# Altium PCB Main_PCB.PcbDoc (part 1 of 2)
Units mil, origin at the board's own origin, x right, y up, seen from the top; angles counter-clockwise.
Board outline 5905.51 x 3937.01 mil, 2 copper layers (Top Layer, Bottom Layer); 255 components, 189 nets, 763 pads, 261 vias.
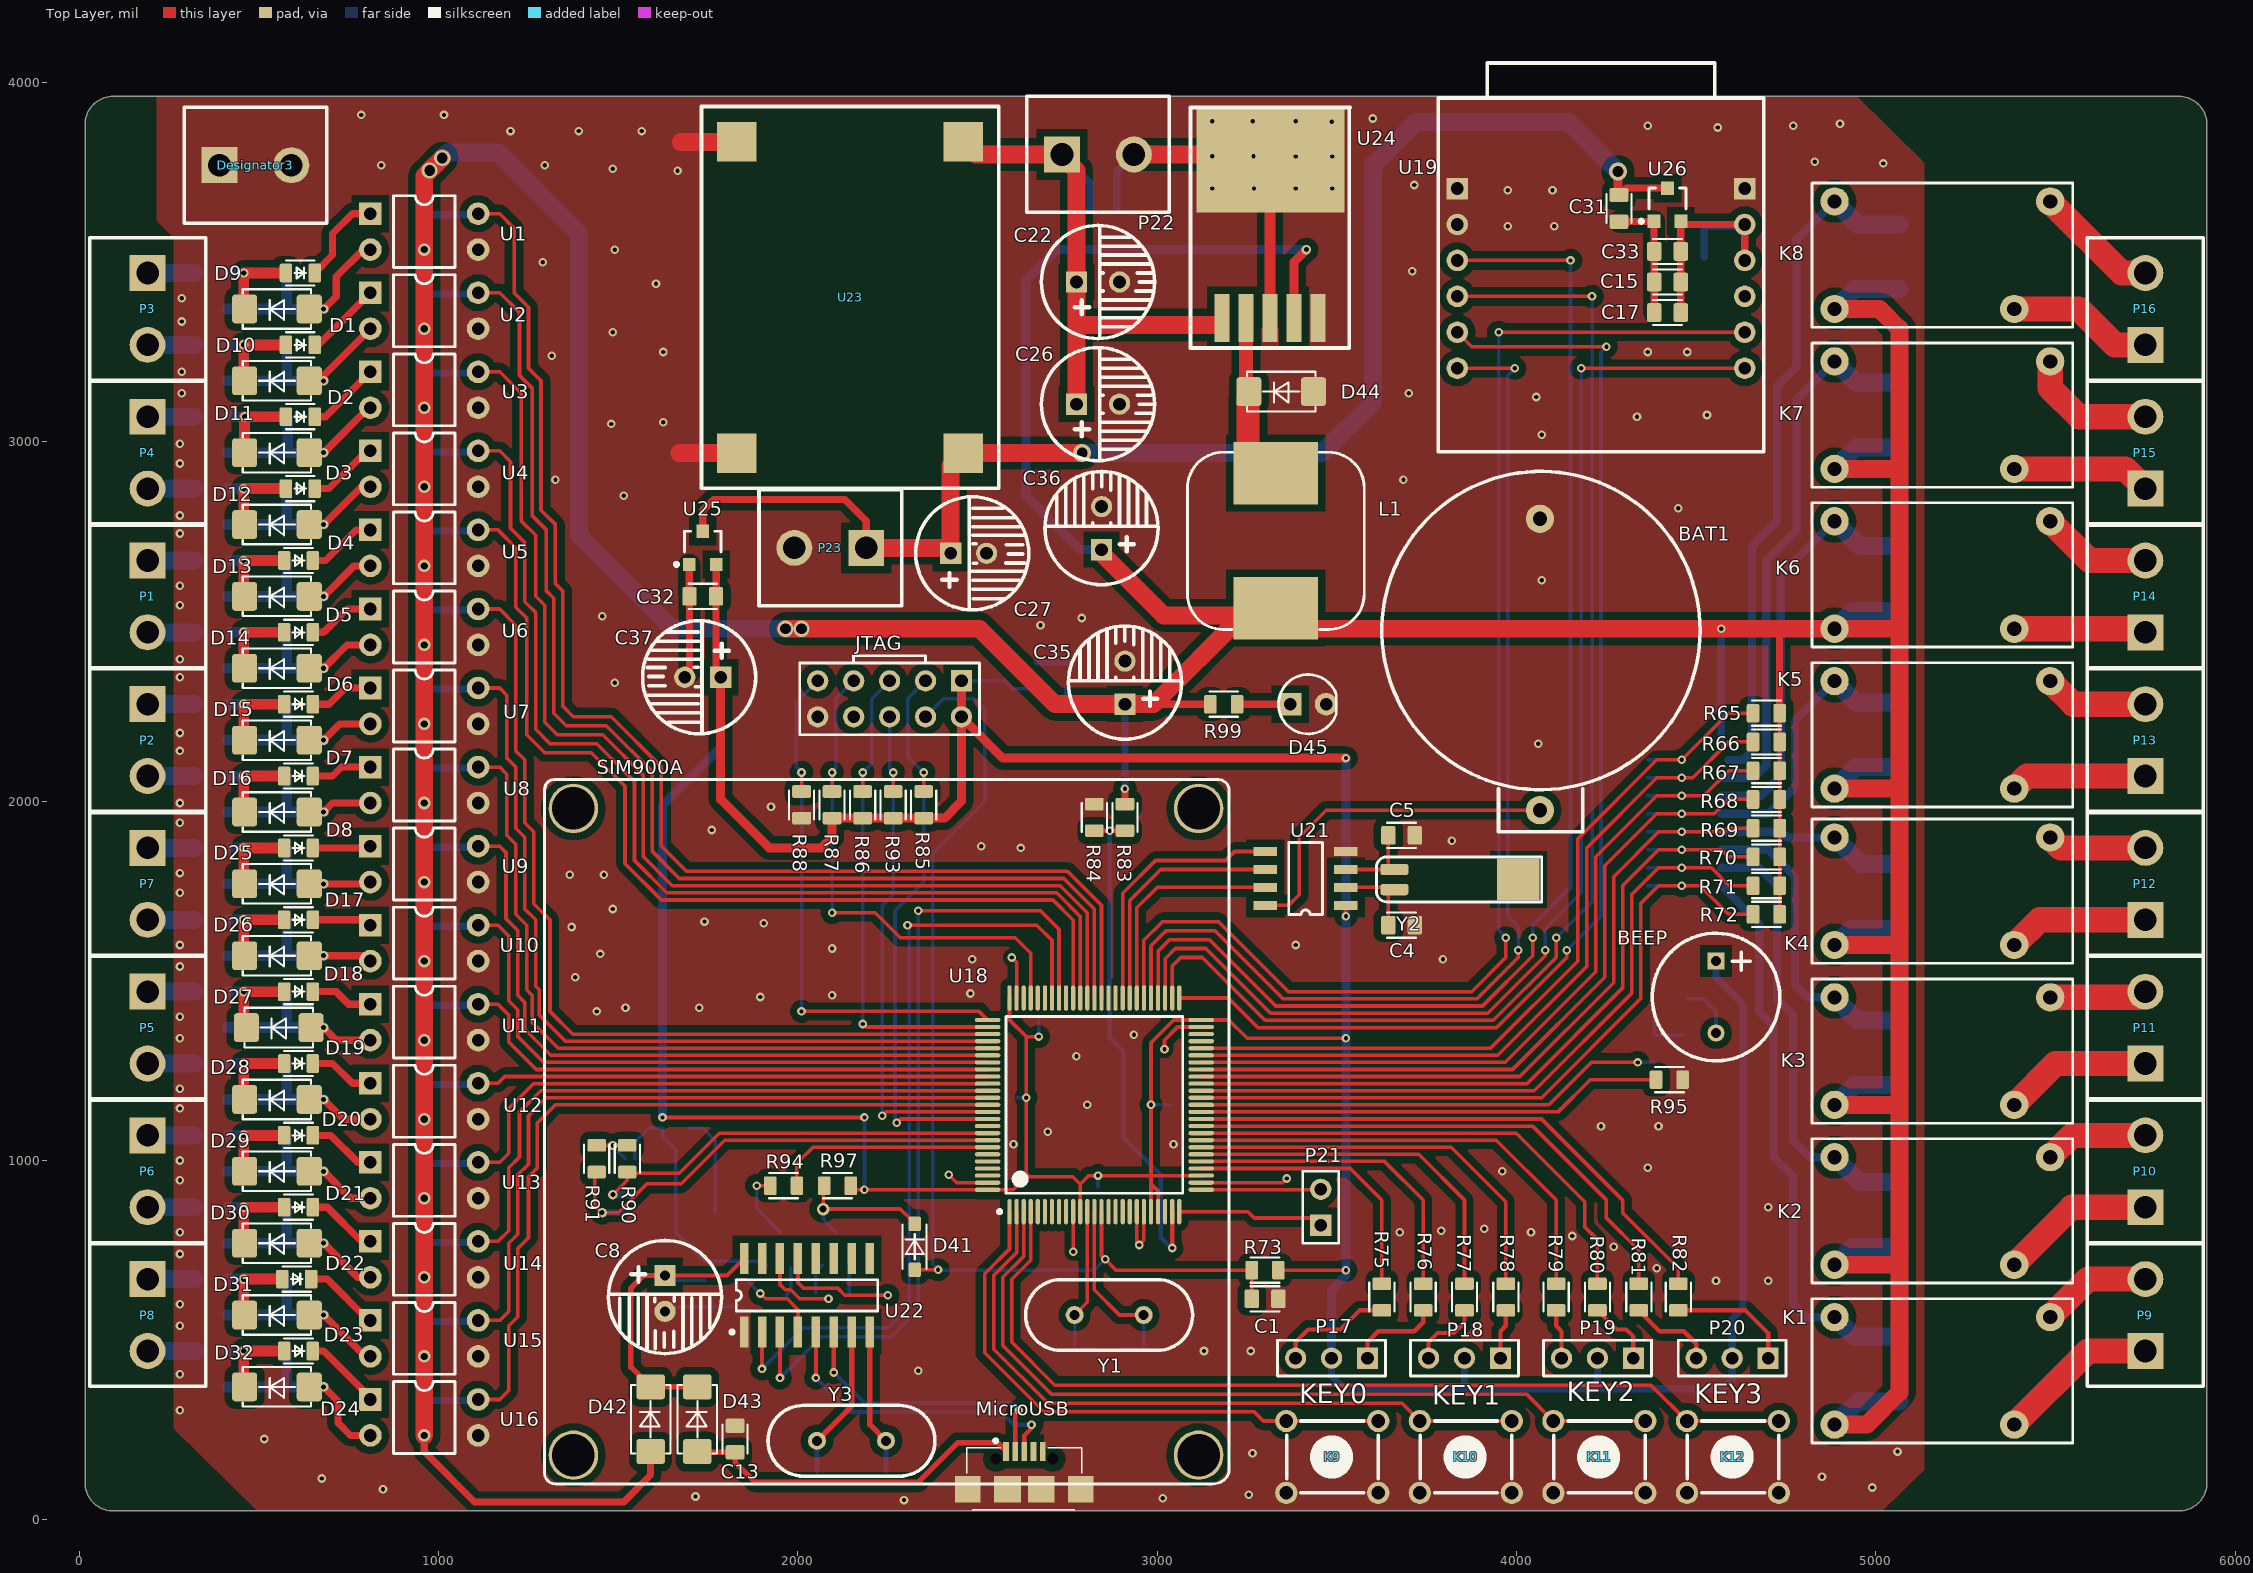
[diagram p0: Top Layer view]
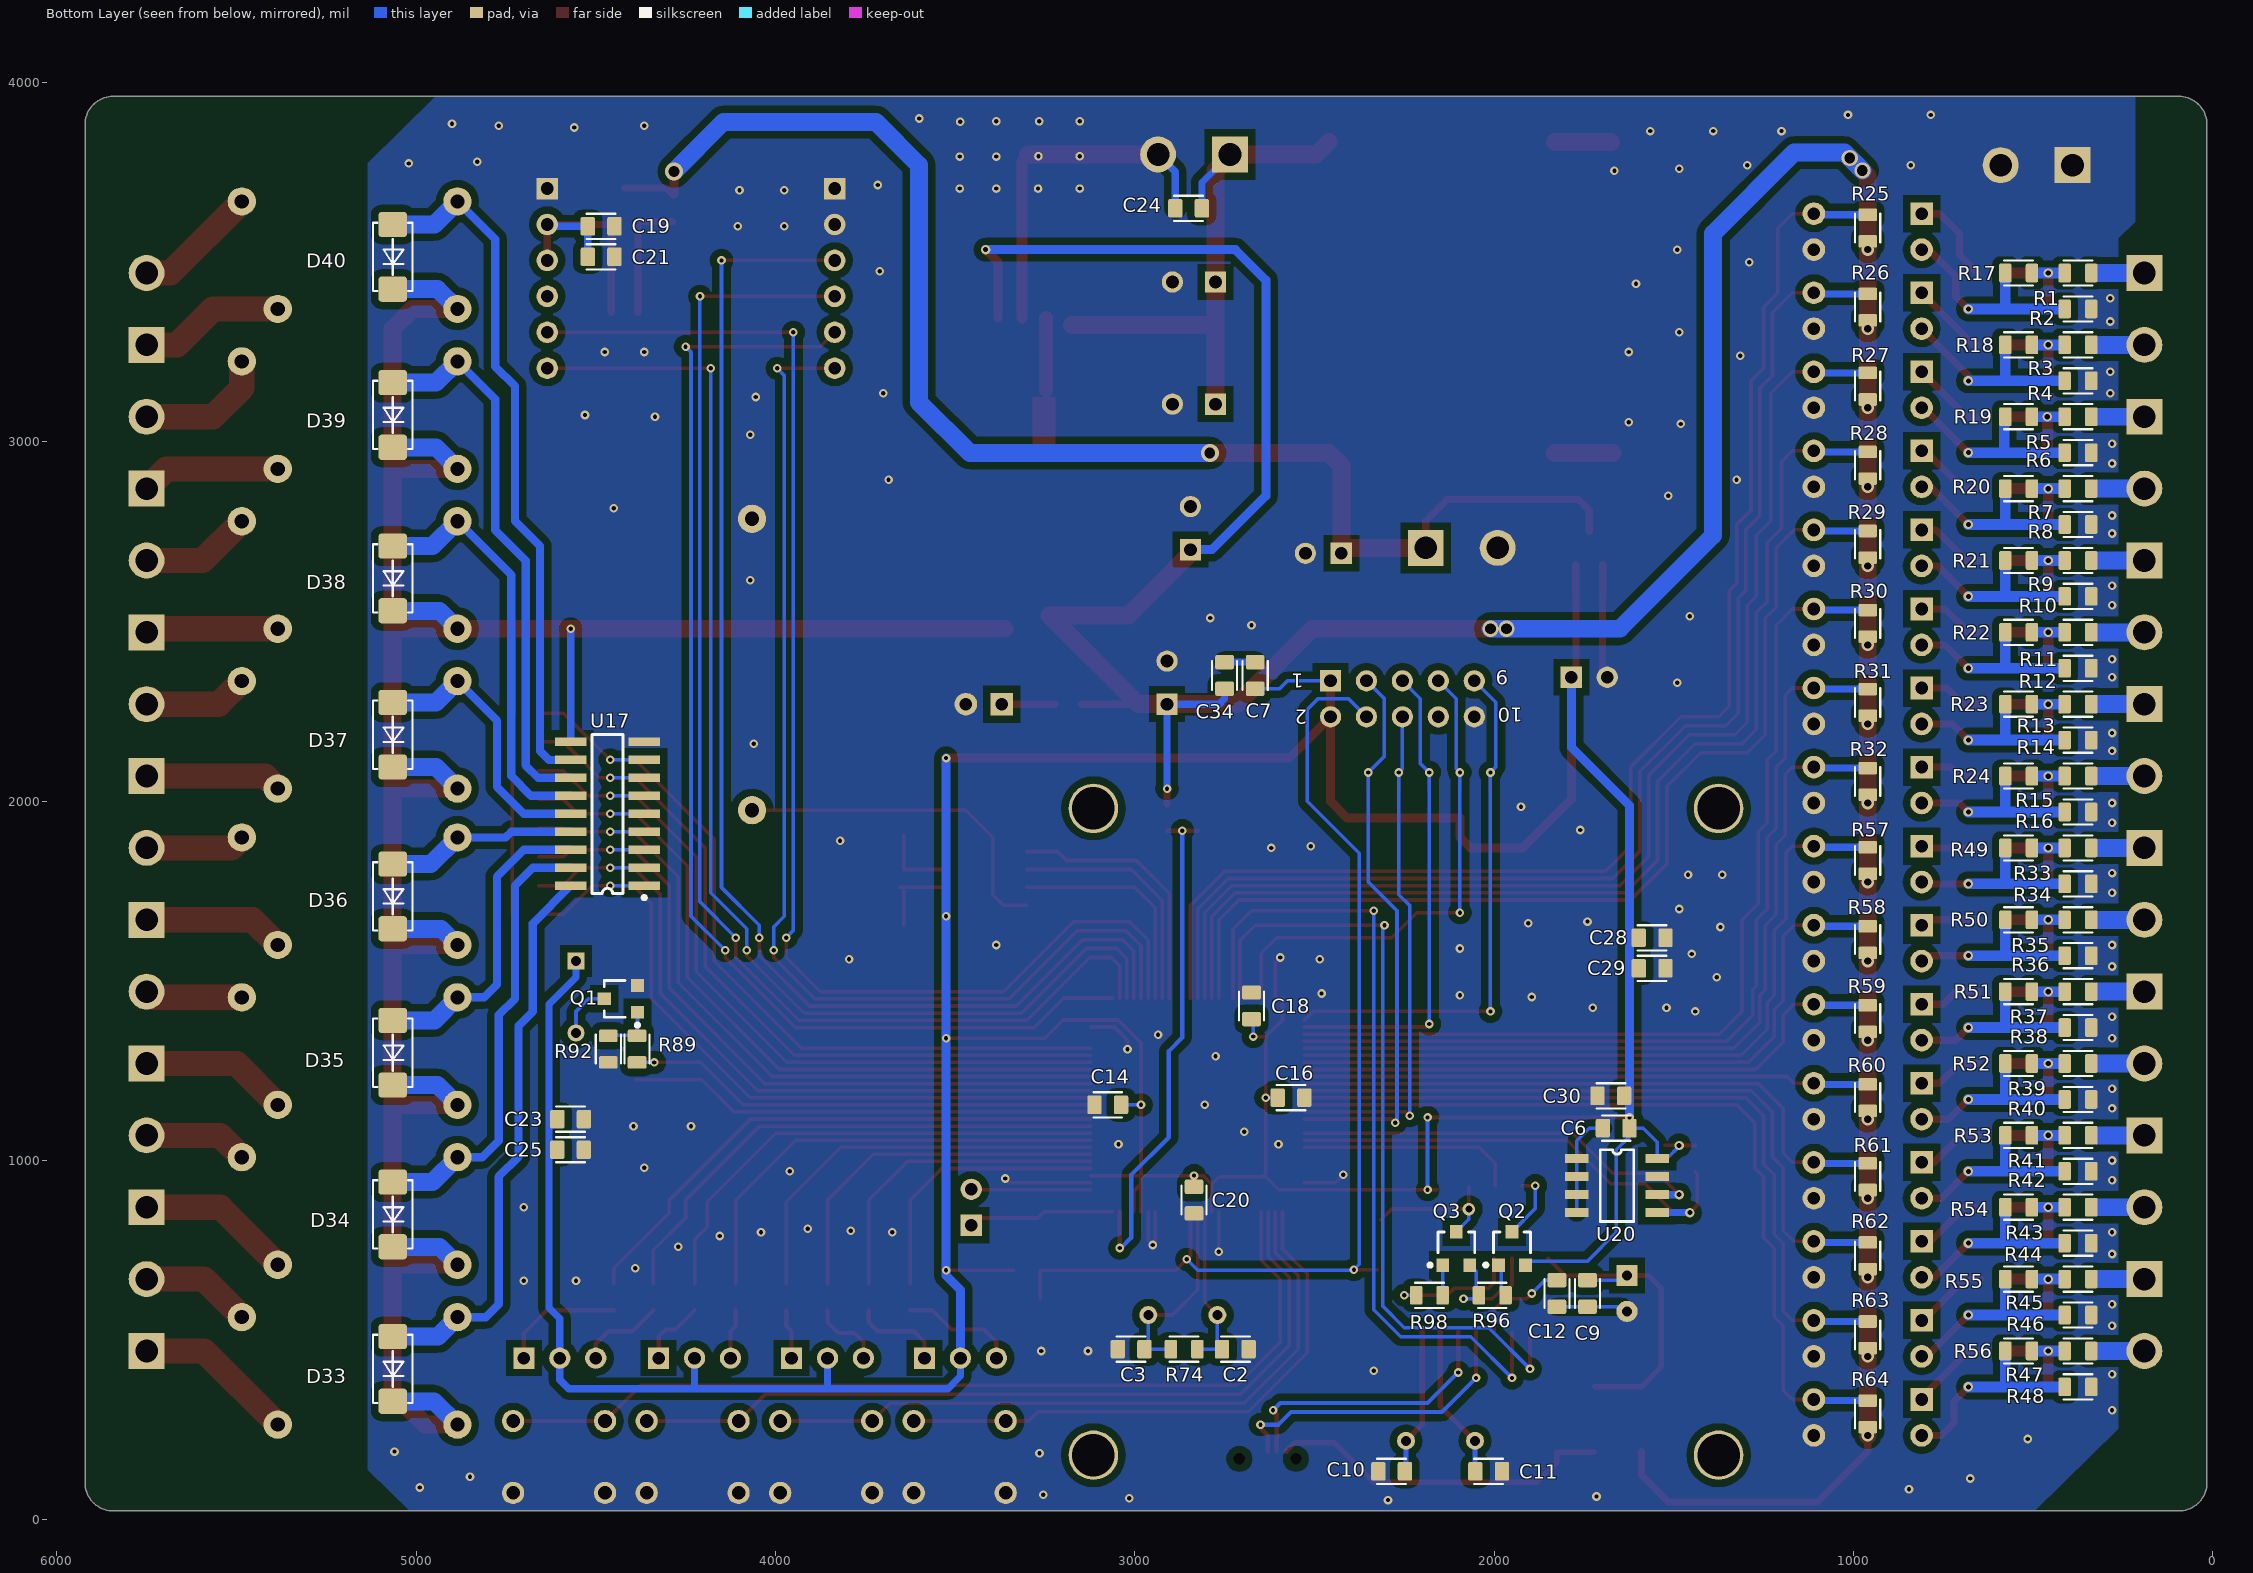
[diagram p1: Bottom Layer view, seen from below]
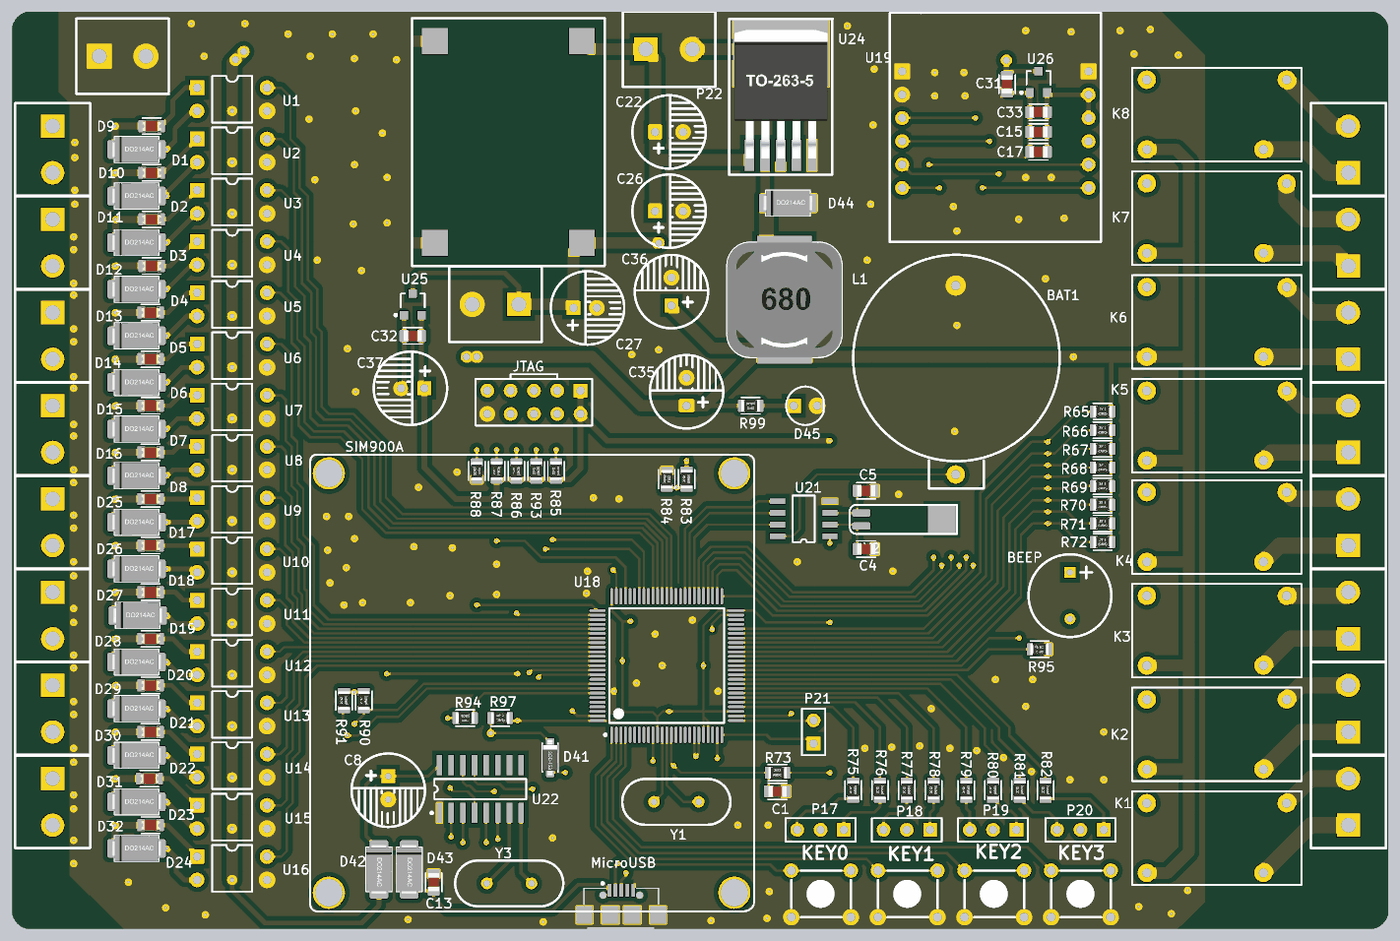
[diagram p3: 3D render of the assembled board from above, using the file's embedded part models]
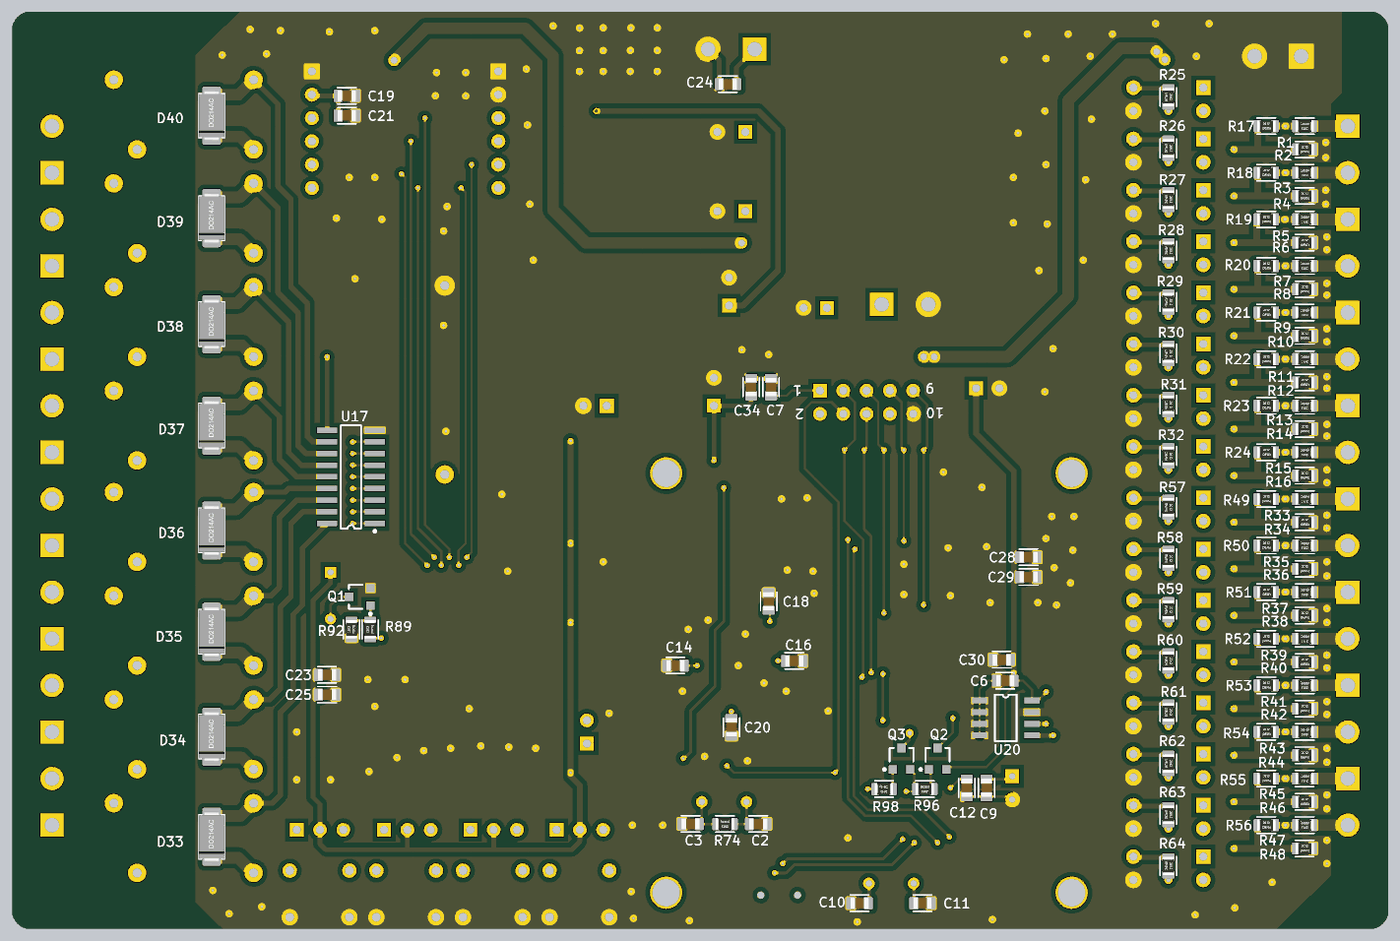
[diagram p4: 3D render of the assembled board from below, using the file's embedded part models]

## Layer stack, top to bottom
Top Layer: signal copper 1.4
Dielectric: dielectric 12.6, FR-4, Dk 4.8
Bottom Layer: signal copper 1.4

## Board outline
15.87,103.41 ccw(c94.61,103.41) 94.61,24.67 5842.64,24.67 ccw(c5842.64,103.41) 5921.38,103.41 5921.38,3882.94 ccw(c5842.64,3882.94) 5842.64,3961.68 94.61,3961.68 ccw(c94.61,3882.94) 15.87,3882.94

## Design rules (kind name [scope] priority, off if disabled: settings)
Clearance [All] p1: gap=10
PolygonConnect [All] p1: connectstyle=Direct reliefconductorwidth=10 reliefentries=4 polygonreliefangle="90 Angle" airgapwidth=10
RoutingVias [All] p1: holewidth=14 width=26 viastyle="Through Hole" minholewidth=12 minwidth=24 maxholewidth=28 maxwidth=50
SolderMaskExpansion [All] p1: expansion=4
Width [All] p1: maxlimit=80 minlimit=10 preferedwidth=20
28 further rules are at their usual default settings.

## Classes and differential pairs
component class InputOutput: D1 D2 D3 D4 D5 D6 D7 D8 D9 D10 D11 D12 D13 D14 D15 D16 D17 D18 D19 D20 D21 D22 D23 D24 D25 D26 D27 D28 D29 D30 D31 D32 D33 D34 D35 D36 D37 D38 D39 D40 K1 K2 K3 K4 K5 K6 K7 K8 P1 P2 P3 P4 P5 P6 P7 P8 P9 P10 P11 P12 P13 P14 P15 P16 R1 R2 R3 R4 R5 R6 R7 R8 R9 R10 R11 R12 R13 R14 R15 R16 R17 R18 R19 R20 R21 R22 R23 R24 R25 R26 R27 R28 R29 R30 R31 R32 R33 R34 R35 R36 R37 R38 R39 R40 R41 R42 R43 R44 R45 R46 R47 R48 R49 R50 R51 R52 R53 R54 R55 R56 R57 R58 R59 R60 R61 R62 R63 R64 R65 R66 R67 R68 R69 R70 R71 R72 U1 U2 U3 U4 U5 U6 U7 U8 U9 U10 U11 U12 U13 U14 U15 U16 U17
component class Main_Sch: BAT1 BEEP C1 C2 C3 C4 C5 C6 C7 JTAG K9 K10 K11 K12 P17 P18 P19 P20 P21 Q1 R73 R74 R75 R76 R77 R78 R79 R80 R81 R82 R83 R84 R85 R86 R87 R88 R89 R90 R91 R92 R93 U18 U19 U20 U21 Y1 Y2
component class OneKey_Download: C8 C9 C10 C11 C12 C13 D41 D42 D43 MicroUSB Q2 Q3 R94 R95 R96 R97 R98 U22 Y3
component class Power: C14 C15 C16 C17 C18 C19 C20 C21 C22 C23 C24 C25 C26 C27 C28 C29 C30 C31 C32 C33 C34 C35 C36 D45 L1 P22 P23 R99 U23 U24 U25 U26

## Components (designator, comment, footprint, x,y, rotation, side; value= is the part's Value field where it differs from the comment)
BAT1 "BATT" CR2032 4065,1975 r180 top
BEEP "BEEP" BELL-5 4555,1555 r270 top (schematic designator BEEP1)
C1 "104" 0805-CAP 3300,615 r0 top
C2 "22p" 0805-CAP 2720,475 r180 bottom
C3 "22p" 0805-CAP 3010,475 r0 bottom
C4 "104" 0805-CAP 3680,1655 r180 top
C5 "104" 0805-CAP 3680,1905 r180 top
C6 "104" 0805-CAP 1660,1090 r0 bottom
C7 "104" 0805-CAP 2665,2350 r90 bottom
C8 "10uF" CAP2.54#1 1630,680 r270 top
C9 "104" 0805-CAP 1740,630 r90 bottom
C10 "22P" 0805-CAP 2285,135 r180 bottom
C11 "22P" 0805-CAP 2015,135 r0 bottom
C12 "104" 0805-CAP 1825,630 r270 bottom
C13 "104" 0805-CAP 1825,225 r270 top
C14 "104" 0805-CAP 3075,1155 r180 bottom
C15 "104" 0805-CAP 4420,3445 r0 top
C16 "104" 0805-CAP 2565,1175 r0 bottom
C17 "104" 0805-CAP 4420,3360 r0 top
C18 "104" 0805-CAP 2675,1430.59 r270 bottom
C19 "104" 0805-CAP 4485,3600 r0 bottom
C20 "104" 0805-CAP 2835,890 r90 bottom
C21 "104" 0805-CAP 4485,3515 r0 bottom
C22 "220uF" CAP3.0 2775,3445 r180 top
C23 "104" 0805-CAP 4570,1115 r0 bottom
C24 "104" 0805-CAP 2850,3650 r180 bottom
C25 "104" 0805-CAP 4570,1030 r0 bottom
C26 "10uF" CAP3.0 2775,3105 r180 top
C27 "100uF" CAP2.54#2 2425,2690 r0 top
C28 "104" 0805-CAP 1560,1620 r0 bottom
C29 "104" 0805-CAP 1560,1535 r0 bottom
C30 "104" 0805-CAP 1675,1180 r180 bottom
C31 "1uF" 0805-CAP 4285,3650 r270 top
C32 "1uF" 0805-CAP 1735,2570 r180 top
C33 "1uF" 0805-CAP 4420,3530 r180 top
C34 "104" 0805-CAP 2750,2350 r270 bottom
C35 "10uF" CAP3.0 2910,2270 r270 top
C36 "220uF" CAP3.0 2845,2700 r270 top
C37 "100uF" CAP2.54#2 1785,2345 r180 top
D1 "1N5819(SS14)" DO-214AC(SMA) 550,3370 r180 top
D2 "1N5819(SS14)" DO-214AC(SMA) 550,3170 r180 top
D3 "1N5819(SS14)" DO-214AC(SMA) 550,2970 r180 top
D4 "1N5819(SS14)" DO-214AC(SMA) 550,2770 r180 top
D5 "1N5819(SS14)" DO-214AC(SMA) 550,2570 r180 top
D6 "1N5819(SS14)" DO-214AC(SMA) 550,2370 r180 top
D7 "1N5819(SS14)" DO-214AC(SMA) 550,2170 r180 top
D8 "1N5819(SS14)" DO-214AC(SMA) 550,1970 r180 top
D9 "LED-R" 0805-LED 615,3470 r0 top
D10 "LED-R" 0805-LED 615,3270 r0 top
D11 "LED-R" 0805-LED 615,3070 r0 top
D12 "LED-R" 0805-LED 615,2870 r0 top
D13 "LED-R" 0805-LED 610,2670 r0 top
D14 "LED-R" 0805-LED 610,2470 r0 top
D15 "LED-R" 0805-LED 610,2270 r0 top
D16 "LED-R" 0805-LED 610,2070 r0 top
D17 "1N5819(SS14)" DO-214AC(SMA) 550,1770 r180 top
D18 "1N5819(SS14)" DO-214AC(SMA) 550,1570 r180 top
D19 "1N5819(SS14)" DO-214AC(SMA) 555,1370 r180 top
D20 "1N5819(SS14)" DO-214AC(SMA) 550,1170 r180 top
D21 "1N5819(SS14)" DO-214AC(SMA) 550,970 r180 top
D22 "1N5819(SS14)" DO-214AC(SMA) 550,770 r180 top
D23 "1N5819(SS14)" DO-214AC(SMA) 550,570 r180 top
D24 "1N5819(SS14)" DO-214AC(SMA) 550,370 r180 top
D25 "LED-R" 0805-LED 610,1870 r0 top
D26 "LED-R" 0805-LED 610,1670 r0 top
D27 "LED-R" 0805-LED 610,1470 r0 top
D28 "LED-R" 0805-LED 610,1270 r0 top
D29 "LED-R" 0805-LED 610,1070 r0 top
D30 "LED-R" 0805-LED 610,870 r0 top
D31 "LED-R" 0805-LED 605,670 r0 top
D32 "LED-R" 0805-LED 610,470 r0 top
D33 "1N4007" DO-214AC(SMA) 5065,420 r270 bottom
D34 "1N4007" DO-214AC(SMA) 5065,850 r270 bottom
D35 "1N4007" DO-214AC(SMA) 5065,1300 r270 bottom
D36 "1N4007" DO-214AC(SMA) 5065,1735 r270 bottom
D37 "1N4007" DO-214AC(SMA) 5065,2185 r270 bottom
D38 "1N4007" DO-214AC(SMA) 5065,2620 r270 bottom
D39 "1N4007" DO-214AC(SMA) 5065,3075 r270 bottom
D40 "1N4007" DO-214AC(SMA) 5065,3515 r270 bottom
D41 "1N4148(T4)" SOD-123 2325,760 r90 top
D42 "1N5819(SS14)" DO-214AC(SMA) 1590,280 r90 top
D43 "1N5819(SS14)" DO-214AC(SMA) 1720,280 r90 top
D44 "SS54" DO-214AC(SMA) 3345,3140 r180 top
D45 "LED-R" DIO-LIG 3370,2270 r0 top
Designator3 "Comment" 2edg5.08_2 390,3770 r0 top
JTAG "JTAG_10" JTAG_10 2455,2335 r180 top (schematic designator JTAG_1)
K1 "307" RELAY-SONGCHUAN 4885,265 r0 top
K2 "307" RELAY-SONGCHUAN 4885,710 r0 top
K3 "307" RELAY-SONGCHUAN 4885,1155 r0 top
K4 "307" RELAY-SONGCHUAN 4885,1600 r0 top
K5 "307" RELAY-SONGCHUAN 4885,2035 r0 top
K6 "307" RELAY-SONGCHUAN 4885,2480 r0 top
K7 "307" RELAY-SONGCHUAN 4885,2925 r0 top
K8 "307" RELAY-SONGCHUAN 4885,3370 r0 top
K9 "KEY_M" KEY_M 3615,75 r180 top
K10 "KEY_M" KEY_M 3986.67,75 r180 top
K11 "KEY_M" KEY_M 4358.33,75 r180 top
K12 "KEY_M" KEY_M 4730,75 r180 top
L1 "470uH" MSS1278CUST 3330,2725 r270 top
MicroUSB "MicroUSB" USB_micro 2630,85 r0 top (schematic designator USB_1)
P1 "2edg5.08" 2edg5.08_2 190,2670 r270 top
P2 "2edg5.08" 2edg5.08_2 190,2270 r270 top
P3 "2edg5.08" 2edg5.08_2 190,3470 r270 top
P4 "2edg5.08" 2edg5.08_2 190,3070 r270 top
P5 "2edg5.08" 2edg5.08_2 190,1470 r270 top
P6 "2edg5.08" 2edg5.08_2 190,1070 r270 top
P7 "2edg5.08" 2edg5.08_2 190,1870 r270 top
P8 "2edg5.08" 2edg5.08_2 190,670 r270 top
P9 "2edg5.08" 2edg5.08_2 5750,470 r90 top
P10 "2edg5.08" 2edg5.08_2 5750,870 r90 top
P11 "2edg5.08" 2edg5.08_2 5750,1270 r90 top
P12 "2edg5.08" 2edg5.08_2 5750,1670 r90 top
P13 "2edg5.08" 2edg5.08_2 5750,2070 r90 top
P14 "2edg5.08" 2edg5.08_2 5750,2470 r90 top
P15 "2edg5.08" 2edg5.08_2 5750,2870 r90 top
P16 "2edg5.08" 2edg5.08_2 5750,3270 r90 top
P17 "Header 3" HDR1X3 3585,450 r180 top
P18 "Header 3" HDR1X3 3955,450 r180 top
P19 "Header 3" HDR1X3 4325,450 r180 top
P20 "Header 3" HDR1X3 4700,450 r180 top
P21 "Header 2" HDR1X2 3455,820 r90 top
P22 "2edg5.08" 2edg5.08_2 2735,3800 r0 top
P23 "Li" 2edg5.08_2 2190,2705 r180 top
Q1 "S8050" SOT-23R 4425,1450 r90 bottom
Q2 "S8550" SOT-23R 1950,750 r180 bottom
Q3 "S8050" SOT-23R 2105,750 r180 bottom
R1 "2K" 0805-RES 375,3470 r0 bottom
R2 "2K" 0805-RES 375,3370 r180 bottom
R3 "2K" 0805-RES 375,3270 r0 bottom
R4 "2K" 0805-RES 375,3170 r180 bottom
R5 "2K" 0805-RES 375,3070 r0 bottom
R6 "2K" 0805-RES 375,2970 r180 bottom
R7 "2K" 0805-RES 375,2870 r0 bottom
R8 "2K" 0805-RES 375,2770 r180 bottom
R9 "2K" 0805-RES 375,2670 r0 bottom
R10 "2K" 0805-RES 375,2570 r180 bottom
R11 "2K" 0805-RES 375,2470 r0 bottom
R12 "2K" 0805-RES 375,2370 r180 bottom
R13 "2K" 0805-RES 375,2270 r0 bottom
R14 "2K" 0805-RES 375,2170 r180 bottom
R15 "2K" 0805-RES 375,2070 r0 bottom
R16 "2K" 0805-RES 375,1970 r180 bottom
R17 "1K" 0805-RES 540,3470 r180 bottom
R18 "1K" 0805-RES 540,3270 r180 bottom
R19 "1K" 0805-RES 540,3070 r180 bottom
R20 "1K" 0805-RES 540,2870 r180 bottom
R21 "1K" 0805-RES 540,2670 r180 bottom
R22 "1K" 0805-RES 540,2470 r180 bottom
R23 "1K" 0805-RES 540,2270 r180 bottom
R24 "1K" 0805-RES 540,2070 r180 bottom
R25 "4.7K" 0805-RES 960,3595 r270 bottom
R26 "4.7K" 0805-RES 960,3375 r270 bottom
R27 "4.7K" 0805-RES 960,3155 r270 bottom
R28 "4.7K" 0805-RES 960,2935 r270 bottom
R29 "4.7K" 0805-RES 960,2715 r270 bottom
R30 "4.7K" 0805-RES 960,2495 r270 bottom
R31 "4.7K" 0805-RES 960,2275 r270 bottom
R32 "4.7K" 0805-RES 960,2055 r270 bottom
R33 "2K" 0805-RES 375,1870 r0 bottom
R34 "2K" 0805-RES 375,1770 r180 bottom
R35 "2K" 0805-RES 375,1670 r0 bottom
R36 "2K" 0805-RES 375,1570 r180 bottom
R37 "2K" 0805-RES 375,1470 r0 bottom
R38 "2K" 0805-RES 375,1370 r180 bottom
R39 "2K" 0805-RES 375,1270 r0 bottom
R40 "2K" 0805-RES 375,1170 r180 bottom
R41 "2K" 0805-RES 375,1070 r0 bottom
R42 "2K" 0805-RES 375,970 r180 bottom
R43 "2K" 0805-RES 375,870 r0 bottom
R44 "2K" 0805-RES 375,770 r180 bottom
R45 "2K" 0805-RES 375,670 r0 bottom
R46 "2K" 0805-RES 375,570 r180 bottom
R47 "2K" 0805-RES 375,470 r0 bottom
R48 "2K" 0805-RES 375,370 r180 bottom
R49 "1K" 0805-RES 540,1870 r180 bottom
R50 "1K" 0805-RES 540,1670 r180 bottom
R51 "1K" 0805-RES 540,1470 r180 bottom
R52 "1K" 0805-RES 540,1270 r180 bottom
R53 "1K" 0805-RES 540,1070 r180 bottom
R54 "1K" 0805-RES 540,870 r180 bottom
R55 "1K" 0805-RES 540,670 r180 bottom
R56 "1K" 0805-RES 540,470 r180 bottom
R57 "4.7K" 0805-RES 960,1835 r270 bottom
R58 "4.7K" 0805-RES 960,1615 r270 bottom
R59 "4.7K" 0805-RES 960,1395 r270 bottom
R60 "4.7K" 0805-RES 960,1175 r270 bottom
R61 "4.7K" 0805-RES 960,955 r270 bottom
R62 "4.7K" 0805-RES 960,735 r270 bottom
R63 "4.7K" 0805-RES 960,515 r270 bottom
R64 "4.7K" 0805-RES 960,295 r270 bottom
R65 "10K" 0805-RES 4695,2245 r0 top
R66 "10K" 0805-RES 4695,2165 r0 top
R67 "10K" 0805-RES 4695,2085 r0 top
R68 "10K" 0805-RES 4695,2005 r0 top
R69 "10K" 0805-RES 4695,1925 r0 top
R70 "10K" 0805-RES 4695,1845 r0 top
R71 "10K" 0805-RES 4695,1765 r0 top
R72 "10K" 0805-RES 4695,1685 r0 top
R73 "10K-5% 0805" 0805-RES 3300,695 r0 top
R74 "1M" 0805-RES 2862.5,475 r0 bottom
R75 "510R" 0805-RES 3625,620 r90 top
R76 "510R" 0805-RES 3740,620 r90 top
R77 "10K" 0805-RES 3855,620 r90 top
R78 "10K" 0805-RES 3970,620 r90 top
R79 "10K" 0805-RES 4110,620 r90 top
R80 "10K" 0805-RES 4225,620 r90 top
R81 "10K" 0805-RES 4340,620 r90 top
R82 "10K" 0805-RES 4450,620 r90 top
R83 "10K" 0805-RES 2910,1955 r90 top
R84 "10K" 0805-RES 2825,1955 r270 top
R85 "10K" 0805-RES 2350,1990 r90 top
R86 "10K" 0805-RES 2180,1990 r90 top
R87 "10K" 0805-RES 2095,1990 r90 top
R88 "10K" 0805-RES 2010,1990 r270 top
R89 "1K" 0805-RES 4385,1310 r90 bottom
R90 "4.7K" 0805-RES 1525,1005 r90 top
R91 "4.7K" 0805-RES 1440,1005 r90 top
R92 "10K" 0805-RES 4465,1310 r90 bottom
R93 "10K" 0805-RES 2265,1990 r90 top
R94 "1K" 0805-RES 1960,930 r180 top
R95 "10K" 0805-RES 4425,1225 r180 top
R96 "1K" 0805-RES 2005,625 r0 bottom
R97 "10K" 0805-RES 2110,930 r0 top
R98 "1K" 0805-RES 2180,625 r0 bottom
R99 "510R" 0805-RES 3185,2270 r180 top
SIM900A "Comment" SIM900A-Model 1375,1980 r0 top locked
U1 "TLP521-1" DIP4 810,3635 r0 top
U2 "TLP521-1" DIP4 810,3415 r0 top
U3 "TLP521-1" DIP4 810,3195 r0 top
U4 "TLP521-1" DIP4 810,2975 r0 top
U5 "TLP521-1" DIP4 810,2755 r0 top
U6 "TLP521-1" DIP4 810,2535 r0 top
U7 "TLP521-1" DIP4 810,2315 r0 top
U8 "TLP521-1" DIP4 810,2095 r0 top
U9 "TLP521-1" DIP4 810,1875 r0 top
U10 "TLP521-1" DIP4 810,1655 r0 top
U11 "TLP521-1" DIP4 810,1435 r0 top
U12 "TLP521-1" DIP4 810,1215 r0 top
U13 "TLP521-1" DIP4 810,995 r0 top
U14 "TLP521-1" DIP4 810,775 r0 top
U15 "TLP521-1" DIP4 810,555 r0 top
U16 "TLP521-1" DIP4 810,335 r0 top
U17 "uln2803" SOP18 4365,1765 r90 bottom
U18 "STM32F103VET6" LQFP100_N 2825,1155 r90 top
U19 "W5500" W5500-Model 3835,3705 r0 top locked
U20 "24C02" SOP-8 1770,1005 r180 bottom
U21 "DS1302" SOP-8 3525,1710 r180 top
U22 "CH340G" SOP16M 2025,625 r0 top
U23 "Li-Charg" Li-Charg 2460,3835 r270 top
U24 "LM2596S_5.0" TO-263-5-2 3180,3345 r0 top
U25 "XC6206" SOT-23R 1735,2700 r0 top
U26 "XC6206" SOT-23R 4420,3655 r0 top
Y1 "8MHz" XTAL_US 2770,570 r0 top
Y2 "32.768KHz" XTAL32_1 3660,1810 r0 top
Y3 "12MHz" XTAL_US 2245,220 r180 top

## Footprints (in the part's own frame and the unit in brackets; to place one, negate y for a bottom-side part, rotate by r counter-clockwise, add the part's x,y. Pads: shape width x height; smd on the part's side, far side on the other; paste and mask are expansions set on the pad)
2edg5.08_2 [mm]
  rect 2.54x2.54 hole 1.6: 1(0,0)
  round 2.54 hole 1.6: 2(5.08,0)
  silkscreen extent -2.5,-4.1 7.58,4.1
0805-CAP [mil]
  rrect25% 40x52 smd: 1(-37,0) 2(37,0)
  silkscreen extent -40,-35 40,35, body extent -39,-24 39,23, height 47
0805-LED [mil]
  rrect25% 35x52 smd: 1(-40,0) 2(40,0)
  silkscreen extent -40,-35 40,35, body extent -40,-25 40,24, height 43
0805-RES [mil]
  rrect25% 35x52 smd: 1(-37,0) 2(37,0)
  silkscreen extent -40,-35 40,35, body extent -39,-25 40,24, height 18
BELL-5 [mm]
  rect 1.2x1.2 hole 0.7: 1(0,0)
  round 1.2 hole 0.7: 2(5.08,0)
  silkscreen extent -1.97,-4.51 7.05,4.51
CAP2.54#1 [mm]
  rect 1.5x1.5 hole 0.7: 1(0,0)
  round 1.5 hole 0.7: 2(2.54,0)
  silkscreen extent -2.48,-4 5.52,4
CAP2.54#2 [mm]
  rect 1.5x1.5 hole 0.9: 1(0,0)
  round 1.5 hole 0.9: 2(2.54,0)
  silkscreen extent -2.48,-4 5.52,4
CAP3.0 [mm]
  rect 1.5x1.5 hole 0.9: 1(0,0)
  round 1.5 hole 0.9: 2(-3.048,0)
  silkscreen extent -5.52,-4 2.48,4
CR2032 [mm]
  round 2 hole 1: 1(0,0) 2(0,-20.6)
  silkscreen extent -11.32,-23.95 11.17,1.52
DIO-LIG [mm]
  rect 1.6x1.6 hole 0.9: 1(0,0)
  round 1.6 hole 0.9: 2(2.54,0)
  silkscreen extent -0.83,-2.1 3.26,2.1
DIP4 [mm]
  rect 1.6x1.6 hole 0.9: 1(0,0)
  round 1.6 hole 0.9: 2(0,-2.54) 3(7.62,-2.54) 4(7.62,0)
  silkscreen extent 1.63,-3.81 5.99,1.27
DO-214AC(SMA) [mil]
  rrect25% 70x80 smd: 1(-90,0) 2(90,0)
  silkscreen extent -95,-55 95,55, body extent -108,-55 108,55, height 91
HDR1X2 [mm] "Connector; Header; 2 Position"
  rect 1.5x1.5 hole 0.9: 1(0,0)
  round 1.5 hole 0.9: 2(2.54,0)
  silkscreen extent -1.27,-1.27 3.81,1.27
HDR1X3 [mm] "Connector; Header; 3 Position"
  rect 1.5x1.5 hole 0.9: 1(0,0)
  round 1.5 hole 0.9: 2(2.54,0) 3(5.08,0)
  silkscreen extent -1.27,-1.27 6.35,1.27
JTAG_10 [mm]
  rect 1.5x1.5 hole 0.9: 1(0,0)
  round 1.5 hole 0.9: 2(0,2.54) 3(2.54,0) 4(2.54,2.54) 5(5.08,0) 6(5.08,2.54) 7(7.62,0) 8(7.62,2.54) 9(10.16,0) 10(10.16,2.54)
  silkscreen extent -1.27,-1.78 11.43,3.81
KEY_M [mil]
  round 62 hole 38: 1(0,0) 1(255.91,0) 2(0,-200) 2(255.91,-200)
  silkscreen extent 0,-200 255,0
Li-Charg [mm]
  rect 2.8x2.8 smd: 1(0,0) 2(0,-16) 3(22,-16) 4(22,0)
  Top Layer pour cut-out: -2.5,2.5 24.5,2.5 24.5,-18.5 -2.5,-18.5
  silkscreen extent -2.5,-18.5 24.5,2.5
LQFP100_N [mm] "Thin QFP, 100-Leads, Body 14x14mm, Pitch 0.5mm, IPC Medium Density"
  oval 1.8x0.3 smd: 1(-7.55,6) 2(-7.55,5.5) 3(-7.55,5) 4(-7.55,4.5) 5(-7.55,4) 6(-7.55,3.5) 7(-7.55,3) 8(-7.55,2.5) 9(-7.55,2) 10(-7.55,1.5) 11(-7.55,1) 12(-7.55,0.5) 13(-7.55,0) 14(-7.55,-0.5) 15(-7.55,-1) 16(-7.55,-1.5) 17(-7.55,-2) 18(-7.55,-2.5) 19(-7.55,-3) 20(-7.55,-3.5) 21(-7.55,-4) 22(-7.55,-4.5) 23(-7.55,-5) 24(-7.55,-5.5) 25(-7.55,-6) 51(7.55,-6) 52(7.55,-5.5) 53(7.55,-5) 54(7.55,-4.5) 55(7.55,-4) 56(7.55,-3.5) 57(7.55,-3) 58(7.55,-2.5) 59(7.55,-2) 60(7.55,-1.5) 61(7.55,-1) 62(7.55,-0.5) 63(7.55,0) 64(7.55,0.5) 65(7.55,1) 66(7.55,1.5) 67(7.55,2) 68(7.55,2.5) 69(7.55,3) 70(7.55,3.5) 71(7.55,4) 72(7.55,4.5) 73(7.55,5) 74(7.55,5.5) 75(7.55,6)
  oval 0.3x1.8 smd: 26(-6,-7.55) 27(-5.5,-7.55) 28(-5,-7.55) 29(-4.5,-7.55) 30(-4,-7.55) 31(-3.5,-7.55) 32(-3,-7.55) 33(-2.5,-7.55) 34(-2,-7.55) 35(-1.5,-7.55) 36(-1,-7.55) 37(-0.5,-7.55) 38(0,-7.55) 39(0.5,-7.55) 40(1,-7.55) 41(1.5,-7.55) 42(2,-7.55) 43(2.5,-7.55) 44(3,-7.55) 45(3.5,-7.55) 46(4,-7.55) 47(4.5,-7.55) 48(5,-7.55) 49(5.5,-7.55) 50(6,-7.55) 76(6,7.55) 77(5.5,7.55) 78(5,7.55) 79(4.5,7.55) 80(4,7.55) 81(3.5,7.55) 82(3,7.55) 83(2.5,7.55) 84(2,7.55) 85(1.5,7.55) 86(1,7.55) 87(0.5,7.55) 88(0,7.55) 89(-0.5,7.55) 90(-1,7.55) 91(-1.5,7.55) 92(-2,7.55) 93(-2.5,7.55) 94(-3,7.55) 95(-3.5,7.55) 96(-4,7.55) 97(-4.5,7.55) 98(-5,7.55) 99(-5.5,7.55) 100(-6,7.55)
  silkscreen extent -7.67,-6.25 6.25,6.82, body extent -7,-7 7,7, height 1.6
MSS1278CUST [mil]
  rect 172.87x236 smd: 1(-187.87,0) 2(187.87,0)
  silkscreen extent -246,-246 247,246, body extent -246,-246 246,246, height 248
RELAY-SONGCHUAN [mm]
  round 2 hole 1: 1(12.7,0) 2(15.24,7.6) 3(0,7.6) 4(0,0)
  silkscreen extent -1.6,-1.3 16.84,8.9
SIM900A-Model [mm]
  round 3.5 hole 3: ""(0,-45.72) ""(0,0) ""(44.196,-45.72) ""(44.196,0)
  silkscreen extent -2.03,-47.75 46.35,2.03
SOD-123 [mil]
  rrect25% 40x35 smd: 1(-64,0) 2(64,0)
  silkscreen extent -62,-33 62,34, body extent -76,-33 76,34, height 56
SOP16M [mm]
  rect 0.6x2.2 smd: 1(-4.445,-2.6) 2(-3.175,-2.6) 3(-1.905,-2.6) 4(-0.635,-2.6) 5(0.635,-2.6) 6(1.905,-2.6) 7(3.175,-2.6) 8(4.445,-2.6) 9(4.445,2.6) 10(3.175,2.6) 11(1.905,2.6) 12(0.635,2.6) 13(-0.635,2.6) 14(-1.905,2.6) 15(-3.175,2.6) 16(-4.445,2.6)
  silkscreen extent -5.42,-2.72 5,1.1
SOP18 [mm]
  rect 0.6x2.2 smd: 1(0,0) 2(1.27,0) 3(2.54,0) 4(3.81,0) 5(5.08,0) 6(6.35,0) 7(7.62,0) 8(8.89,0) 9(10.16,0) 10(10.16,5.2) 11(8.89,5.2) 12(7.62,5.2) 13(6.35,5.2) 14(5.08,5.2) 15(3.81,5.2) 16(2.54,5.2) 17(1.27,5.2) 18(0,5.2)
  silkscreen extent -0.97,-0.12 10.69,3.7
SOP-8 [mil]
  rect 65x25 smd: 1(0,0) 2(0,-50) 3(0,-100) 4(0,-150) 5(224.41,-150) 6(224.41,-100) 7(224.41,-50) 8(224.41,0)
  silkscreen extent 65,-175 159,25
SOT-23R [mm]
  rect 0.9x0.95 smd: 1(0.95,-1.048) 2(-0.95,-1.048) 3(0,1.302)
  silkscreen extent -1.98,-1.17 1.3,1.3
TO-263-5-2 [mil]
  rect 41.34x133.86 smd: 1(0,0) 2(66.93,0) 3(133.86,0) 4(200.79,0) 5(267.72,0)
  round 24 hole 12: 6(-27,360) 6(-27,450) 6(-27,547) 6(86,547) 6(88,450) 6(89,360) 6(205,360) 6(205,449) 6(205,547) 6(306,546) 6(307,360) 6(307,449)
  rect 411.42x287.4 smd: 6(135.17,437.37)
  silkscreen extent -87,-84 356,586, body extent -65,-14 335,538, height 180
USB_micro [mm]
  rect 1.8x1.9 smd: 0(-4,0) 0(4,0)
  round 0 hole 0.8: 0(-2,2.15) 0(2,2.15)
  rect 1.9x1.9 smd: 0(-1.2,0) 0(1.2,0)
  rect 0.4x1.35 smd: 1(-1.3,2.675) 2(-0.65,2.675) 3(0,2.675) 4(0.65,2.675) 5(1.3,2.675)
  silkscreen extent -4.06,-1.45 4.06,3.55
W5500-Model [mil]
  rect 60x60 hole 35.43: 1(0,0) 12(800,0)
  round 60 hole 35.43: 2(0,-100) 3(0,-200) 4(0,-300) 5(0,-400) 6(0,-500) 7(800,-500) 8(800,-400) 9(800,-300) 10(800,-200) 11(800,-100)
  silkscreen extent -53,-732 853,349
XTAL32_1 [mil]
  rrect50% 78.74x31.5 smd: 1(0,0) 2(0,-56)
  rect 118x118 smd: ""(345,-28)
  Top Layer pour cut-out: 410,35 409.9,-90 44,-88 -1,-88 -21.01,-89.99 -45,-78 -50,-62 -50,6.01 -40,26 -22.01,35 3,32
  silkscreen extent -50,-90 410,35
XTAL_US [mil]
  round 50 hole 28: 1(0,0) 2(192.13,0)
  silkscreen extent -136,-98 328,98

## Part data
BAT1: library part BAT
C1 C2 C3 C6 C7: library part CAP, "陶瓷电容"
C4 C5 C9 C10 C11 C12 C13 C14 C15 C16 C17 C18 C19 C20 C21 C23 C24 C25 C28 C29 C30 C31 C32 C33 C34: library part C
C8 C22 C26 C27 C35 C36: library part CAP
D1 D2 D3 D4 D5 D6 D7 D8 D17 D18 D19 D20 D21 D22 D23 D24 D42 D43: "肖特基二极管"
D9 D10 D11 D12 D13 D14 D15 D16 D25 D26 D27 D28 D29 D30 D31 D32 D45: library part LED-RED, "红色LED"
D33 D34 D35 D36 D37 D38 D39 D40: "1A整流二极管"
D41: library part 1N4148, "高速开关二极管"
K1 K2 K3 K4 K5 K6 K7 K8: library part JDQ_307, "继电器"
L1: library part INDUCTOR
MicroUSB: library part USB5
P1 P2 P3 P4 P5 P6 P7 P8 P9 P10 P11 P12 P13 P14 P15 P16 P22 P23: library part 2EDG5.08_2, "端子"
P17 P18 P19 P20: "Header, 3-Pin"
P21: "Header, 2-Pin"
Q1 Q3: library part NPN, "8050/BCW846/BCW847"
Q2: library part PNP, "8550/BCW68"
R1 R2 R3 R4 R5 R6 R7 R8 R9 R10 R11 R12 R13 R14 R15 R16 R17 R18 R19 R20 R21 R22 R23 R24 R25 R26 R27 R28 R29 R30 R31 R32 R33 R34 R35 R36 R37 R38 R39 R40 R41 R42 R43 R44 R45 R46 R47 R48 R49 R50 R51 R52 R53 R54 R55 R56 R57 R58 R59 R60 R61 R62 R63 R64 R65 R66 R67 R68 R69 R70 R71 R72 R75 R76 R77 R78 R79 R80 R81 R82 R83 R84 R94 R95 R96 R97 R98 R99: library part Res
R73 R74 R85 R86 R87 R88 R90 R91 R93: library part RES-1%, "高精度电阻"
R89 R92: library part R
U1 U2 U3 U4 U5 U6 U7 U8 U9 U10 U11 U12 U13 U14 U15 U16: library part TLP521, "光耦"
U18: "STM32 ARM-based 32-bit MCU with 64 Kbytes Flash, 100-pin LQFP, Industrial Temperature"
U20: library part 24C256
U21: "实时时钟"
U22: "USB2UART"
U23: "锂电池充电模块"
U24: "3A开关电源芯片"
U25 U26: "LDO"
Y1 Y2 Y3: library part XTAL, "Crystal Oscillator"

## Via types
v1: diameter 24, hole 12, Top Layer to Bottom Layer, 202 vias
v2: diameter 26, hole 14, Top Layer to Bottom Layer, 20 vias
v3: diameter 35, hole 20, Top Layer to Bottom Layer, 17 vias
v4: diameter 26, hole 15, Top Layer to Bottom Layer, 16 vias
v5: diameter 45, hole 30, Top Layer to Bottom Layer, 4 vias
v6: diameter 50, hole 30, Top Layer to Bottom Layer, 2 vias

## Nets (pads, with @x,y where several pads share a name; then routed paths per layer and width w, separated by ;. In a path a pad name is that pad's centre, name@x,y a point inside that pad or via, vN(x,y) a via of type N, cw(c..) or ccw(c..) an arc to the next point about the centre after c; other vN are vias at no path point)
AD_IN1: R83.1 R84.2 U18.24 | length 1420.7
  Top Layer w12: R84.2@2825,1918 v1(2867.5,1918) R83.1@2910,1918 ; v1(3041.54,756.54) U18.24@3041.54,857.76
  Bottom Layer w12: v1(2867.5,1918) 2867.5,1342.5 2905,1305 2905,1065 3010,960 3010,785 v1@3040,755
BEEP: R89.1 U18.38 | length 1311.6
  Top Layer w10: U18.38@3122.24,1155 4090,1155 4208,1273 v1(4337,1273)
  Bottom Layer w10: v1(4337,1273) R89.1@4385,1273
BOOT0: R94.1 U18.94 | length 611.3
  Top Layer w10: R94.1@1997,930 1997,992 2041.89,1036.89 U18.94@2527.76,1036.89
BOOT1: R95.2 U18.37 | length 1302.9
  Top Layer w10: U18.37@3122.24,1135.31 4115.32,1135.31 4205,1225 R95.2@4388,1225
CH340_D+: MicroUSB.3 U22.5 | length 864.5
  Top Layer w12: v1(2050,395) U22.5@2050,522.64 ; MicroUSB.3@2630,190.31 2630,235 2650,255 v1(2650,265)
  Bottom Layer w12: v1(2050,395) 2145,300 2565,300 2600,265 v1(2650,265)
CH340_D-: MicroUSB.2 U22.6 | length 795.2
  Top Layer w12: v1(2100,410) U22.6@2100,522.64 ; MicroUSB.2@2604.41,190.31 2604.41,294.41 v1(2615,305)
  Bottom Layer w12: v1@2100,415 v1(2100,410) 2185,325 2595,325 v1(2615,305)
CPU_IN1: R25.1 U1.4 U18.62 | length 3765.9
  Top Layer w10: U1.4@1110,3635 1170,3635 1210,3595 1210,3415 1250,3375 1250,3205 1285,3170 1285,2810 1325,2770 1325,2605 1345,2585 1345,2265 1375,2235 1480,2235 1620,2095 1620,1875 1690,1805 2750,1805 2844.68,1710.31 U18.62@2844.68,1452.24
  Bottom Layer w20: R25.1@960,3632 U1.4@1107,3632
CPU_IN2: R26.1 U2.4 U18.63 | length 3547.5
  Top Layer w10: U2.4@1110,3415 1170,3415 1225,3360 1225,3185 1260,3150 1260,2795 1300,2755 1300,2585 1320,2565 1320,2245 1355,2210 1466.72,2210 1595,2081.72 1595,1860 1670,1785 2740,1785 2825,1700 U18.63@2825,1452.24
  Bottom Layer w20: R26.1@960,3412 U2.4@1107,3412
CPU_IN3: R27.1 U3.4 U18.64 | length 3333.8
  Top Layer w10: U3.4@1110,3195 1170,3195 1230,3135 1230,2780 1270,2740 1270,2570 1295,2545 1295,2220 1330,2185 1456.36,2185 1570,2071.36 1570,1845 1650,1765 2730,1765 2805.32,1689.69 U18.64@2805.32,1452.24
  Bottom Layer w20: R27.1@960,3192 U3.4@1107,3192
CPU_IN4: R28.1 U4.4 U18.65 | length 3110.7
  Top Layer w10: U4.4@1110,2975 1170,2975 1200,2945 1200,2760 1240,2720 1240,2555 1270,2525 1270,2200 1310,2160 1440,2160 1545,2055 1545,1835 1635,1745 2720,1745 2785.63,1679.37 U18.65@2785.63,1452.24
  Bottom Layer w20: R28.1@960,2972 U4.4@1107,2972
CPU_IN5: R29.1 U5.4 U18.66 | length 2882.5
  Top Layer w10: U5.4@1110,2755 1165,2755 1215,2705 1215,2540 1245,2510 1245,2185 1295,2135 1425,2135 1518.7,2041.3 1518.7,1826.3 1620,1725 2710,1725 2765.94,1669.06 U18.66@2765.94,1452.24
  Bottom Layer w20: R29.1@960,2752 U5.4@1107,2752
CPU_IN6: R30.1 U6.4 U18.78 | length 2628.9
  Top Layer w10: U6.4@1110,2535 1170,2535 1215,2490 1215,2140 1240,2115 1240,1940 1265,1915 1265,1715 1310,1670 1310,1415 1373.15,1351.85 U18.78@2527.76,1351.85
  Bottom Layer w20: R30.1@960,2532 U6.4@1107,2532
CPU_IN7: R31.1 U7.4 U18.79 | length 2440.5
  Top Layer w10: U7.4@1110,2315 1170,2315 1190,2295 1190,2120 1215,2095 1215,1925 1240,1900 1240,1700 1270,1670 1270,1485 1280,1475 1280,1405 1352.83,1332.17 U18.79@2527.76,1332.17
  Bottom Layer w20: R31.1@960,2312 U7.4@1107,2312
CPU_IN8: R32.1 U8.4 U18.80 | length 2252.1
  Top Layer w10: U8.4@1110,2095 1170,2095 1190,2075 1190,1905 1215,1880 1215,1685 1245,1655 1245,1475 1260,1460 1260,1385 1332.52,1312.48 U18.80@2527.76,1312.48
  Bottom Layer w20: R32.1@960,2092 U8.4@1107,2092
CPU_IN9: R57.1 U9.4 U18.81 | length 2063.7
  Top Layer w10: U9.4@1110,1875 1170,1875 1187.5,1857.5 1187.5,1672.5 1220,1640 1220,1460 1240,1440 1240,1365 1312.2,1292.8 U18.81@2527.76,1292.8
  Bottom Layer w20: R57.1@960,1872 U9.4@1107,1872
CPU_IN10: R58.1 U10.4 U18.82 | length 1872.3
  Top Layer w10: U10.4@1110,1655 1165,1655 1195,1625 1195,1445 1220,1420 1220,1345 1291.89,1273.11 U18.82@2527.76,1273.11
  Bottom Layer w20: R58.1@960,1652 U10.4@1107,1652
CPU_IN11: R59.1 U11.4 U18.83 | length 1683.9
  Top Layer w10: U11.4@1110,1435 1165,1435 1195,1405 1195,1330 1271.57,1253.43 U18.83@2527.76,1253.43
  Bottom Layer w20: R59.1@960,1432 U11.4@1107,1432
CPU_IN12: R60.1 U12.4 U18.84 | length 1572.5
  Top Layer w10: U12.4@1110,1215 1165,1215 1183.74,1233.74 U18.84@2527.76,1233.74
  Bottom Layer w20: R60.1@960,1212 U12.4@1107,1212
CPU_IN13: R61.1 U13.4 U18.85 | length 1728.7
  Top Layer w10: U13.4@1110,995 1170,995 1195,1020 1195,1145 1264.06,1214.06 U18.85@2527.76,1214.06
  Bottom Layer w20: R61.1@960,992 U13.4@1107,992
CPU_IN14: R62.1 U14.4 U18.86 | length 1914.2
  Top Layer w10: U14.4@1110,775 1165,775 1195,805 1195,980 1225,1010 1225,1135 1284.37,1194.37 U18.86@2527.76,1194.37
  Bottom Layer w20: R62.1@960,772 U14.4@1107,772
CPU_IN15: R63.1 U15.4 U18.87 | length 2108.5
  Top Layer w10: U15.4@1110,555 1170,555 1195,580 1195,770 1220,795 1220,960 1250,990 1250,1125 1299.69,1174.69 U18.87@2527.76,1174.69
  Bottom Layer w20: R63.1@960,552 U15.4@1107,552
CPU_IN16: R64.1 U16.4 U18.88 | length 2294
  Top Layer w10: U16.4@1110,335 1170,335 1195,360 1195,540 1220,565 1220,755 1250,785 1250,955 1275,980 1275,1105 1325,1155 U18.88@2527.76,1155
  Bottom Layer w20: R64.1@960,332 U16.4@1107,332
CPU_JDQ1: R72.1 U17.1 U18.39 | length 2063.6
  Top Layer w10: U18.39@3122.24,1174.69 4069.68,1174.69 4345,1450 4345,1715 4395,1765 v1(4460,1765) 4510,1765 4590,1685 R72.1@4658,1685
  Bottom Layer w10: U17.1@4365,1765 v1(4460,1765)
CPU_JDQ2: R71.1 U17.2 U18.40 | length 2069.6
  Top Layer w10: U18.40@3122.24,1194.37 4049.37,1194.37 4320,1465 4320,1740 4395,1815 v1(4460,1815) 4542.25,1815 4592.25,1765 R71.1@4658,1765
  Bottom Layer w10: U17.2@4365,1815 v1(4460,1815)
CPU_JDQ3: R70.1 U17.3 U18.41 | length 2075.6
  Top Layer w10: U18.41@3122.24,1214.06 4029.06,1214.06 4295,1480 4295,1765 4395,1865 v1(4460,1865) 4570,1865 4590,1845 R70.1@4658,1845
  Bottom Layer w10: U17.3@4365,1865 v1(4460,1865)
CPU_JDQ4: R69.1 U17.4 U18.42 | length 2089.9
  Top Layer w10: U18.42@3122.24,1233.74 4008.74,1233.74 4270,1495 4270,1790 4395,1915 v1(4460,1915) 4580,1915 4590,1925 R69.1@4658,1925
  Bottom Layer w10: U17.4@4365,1915 v1(4460,1915)
CPU_JDQ5: R68.1 U17.5 U18.43 | length 2123.7
  Top Layer w10: U18.43@3122.24,1253.43 3988.43,1253.43 4245,1510 4245,1820 4390,1965 v1(4460,1965) 4550,1965 4590,2005 R68.1@4658,2005
  Bottom Layer w10: U17.5@4365,1965 v1(4460,1965)
CPU_JDQ6: R67.1 U17.6 U18.44 | length 2154.5
  Top Layer w10: U18.44@3122.24,1273.11 3968.11,1273.11 4220,1525 4220,1845 4390,2015 v1(4460,2015) 4521,2015 4591,2085 R67.1@4658,2085
  Bottom Layer w10: U17.6@4365,2015 v1(4460,2015)
CPU_JDQ7: R66.1 U17.7 U18.45 | length 2185.3
  Top Layer w10: U18.45@3122.24,1292.8 3947.8,1292.8 4195,1540 4195,1870 4390,2065 v1(4460,2065) 4490,2065 4590,2165 R66.1@4658,2165
  Bottom Layer w10: U17.7@4365,2065 v1(4460,2065)
CPU_JDQ8: R65.1 U17.8 U18.46 | length 2216.2
  Top Layer w10: U18.46@3122.24,1312.48 3927.48,1312.48 4170,1555 4170,1895 4390,2115 v1(4460,2115) 4590,2245 R65.1@4658,2245
  Bottom Layer w10: U17.8@4365,2115 v1(4460,2115)
DS_IO: U18.58 U21.6 | length 684.2
  Top Layer w10: U18.58@2923.43,1452.24 2923.43,1723.43 3010,1810 U21.6@3300.59,1810
DS_RST: U18.59 U21.5 | length 736.5
  Top Layer w10: U18.59@2903.74,1452.24 2903.74,1743.74 2995,1835 3190,1835 3215,1860 U21.5@3300.59,1860
DS_SCLK: U18.57 U21.7 | length 631.9
  Top Layer w10: U18.57@2943.11,1452.24 2943.11,1703.11 3000,1760 U21.7@3300.59,1760
GND: BAT1.2 C1.2 C2.2 C3.2 C4.1 C5.1 C6.2 C7.2 C8.2 C9.1 C10.1 C11.1 C12.2 C13.1 C14.1 C15.1 C16.1 C17.1 C18.1 C19.1 C20.1 C21.1 C22.2 C23.1 C24.1 C25.1 C26.2 C27.2 C28.1 C29.1 C30.1 C31.2 C32.2 C33.2 C34.1 C35.2 C36.2 C37.2 D44.1 D45.2 Designator3.1 Designator3.2 JTAG.10 K9.1 K10.1 K11.1 K12.1 MicroUSB.0@2472.52,85 MicroUSB.0@2582.76,85 MicroUSB.0@2677.24,85 MicroUSB.0@2787.48,85 MicroUSB.5 P22.2 P23.2 Q1.1 R2.2 R4.2 R6.2 R8.2 R10.2 R12.2 R14.2 R16.2 R34.2 R36.2 R38.2 R40.2 R42.2 R44.2 R46.2 R48.2 R84.1 R88.2 R92.1 R95.1 U1.3 U2.3 U3.3 U4.3 U5.3 U6.3 U7.3 U8.3 U9.3 U10.3 U11.3 U12.3 U13.3 U14.3 U15.3 U16.3 U17.9 U18.10 U18.19 U18.20 U18.27 U18.49 U18.74 U18.99 U19.1 U19.2 U19.12 U20.1 U20.2 U20.3 U20.4 U20.7 U21.4 U22.1 U23.2 U23.3 U24.3 U24.5 U24.6 U25.2 U26.2 | length 3432.5
  Top Layer w10: v1(2420,960) 2441.54,938.46 U18.99@2527.76,938.46 ; v1(2595,1565) 2608.46,1551.54 U18.74@2608.46,1452.24 ; v1(2765.94,745.94) U18.10@2765.94,857.76 ; U18.19@2943.11,857.76 2943.11,771.89 v1(2950,765) 2962.8,777.8 U18.20@2962.8,857.76 ; v1(3020,1310) 3020,1335 3056.54,1371.54 U18.49@3122.24,1371.54 ; U18.27@3122.24,938.46 3348.46,938.46 v1(3360,950)
  Top Layer w20: C32.2@1697.6,2570.4 U25.2@1697.6,2658.74 ; C37.2@1698,2358 C32.2@1698,2570 ; C31.2@4285,3613 U26.2@4381.86,3613 ; C33.2@4382.6,3520.4 U26.2@4382.6,3613.74 ; C17.1@4383,3360 C15.1@4383,3445 C33.2@4383,3520
  Top Layer w30: U24.3@3313.86,3345 U24.6@3313.86,3781.06
  Top Layer w50: 1670,2968.86 U23.3@1830.08,2968.86 ; 1675,3835 U23.2@1830.08,3835 ; P22.2@2935,3800 U24.6@3297.54,3800
  Bottom Layer w10: C8.2@1630,580 1643,593 C9.1@1740,593 C12.2@1825,593 ; C6.2@1697,1090 1735,1090 1770,1055 U20.1@1770,1005 U20.2@1770,955 U20.3@1770,905 U20.4@1770,855
  Bottom Layer w20: C7.2@2665,2387 C34.1@2750,2387 ; C24.1@2887,3650 2887,3752 P22.2@2935,3800
  other v1: 2295,55 3015,60 1715,65 3255,70 845,85 4990,90 675,115 4850,120 3265,185 5060,190 515,225 280,305 280,405 2335,415 3130,470 3260,470 280,540 280,600 4555,665 4700,665 4390,700 280,740 4270,760 4155,790 280,800 3675,800 4040,800 3790,805 3910,810 4700,870 280,945 3960,970 4365,980 280,1000 2600,1045 3045,1045 2695,1080 4235,1095 4395,1095 280,1145 2805.32,1155 280,1200 2775,1290 280,1340 2935,1350 280,1400 1440,1415 1520,1425 1725,1425 1895,1455 2095,1460 2480,1465 1380,1510 280,1540 2485,1560 3795,1560 1450,1575 2095,1590 280,1600 3385,1600 1370,1650 1905,1660 1740,1665 1485,1700 280,1745 1365,1795 1460,1795 280,1800 2620,1870 2510,1875 3820,1890 1760,1920 280,1940 1925,1985 280,1995 280,2140 4060,2160 280,2190 1490,2330 280,2345 280,2395 2675,2490 2790,2510 1455,2515 280,2545 280,2600 4070,2615 280,2745 280,2795 4450,2815 1515,2850 1325,2895 3685,2895 280,2940 280,2995 4070,3020 1480,3050 1625,3055 4335,3070 4530,3075 4055,3125 285,3135 3700,3135 285,3195 1315,3240 1625,3250 4365,3250 4475,3250 1485,3305 285,3335 285,3400 1605,3440 3710,3475 1290,3500 1490,3535 3975,3600 4105,3600 3975,3700 4100,3700 3715,3715 1665,3755 1485,3760 840,3770 1295,3770 5020,3775 4830,3780 1200,3865 1390,3865 1565,3865 4560,3875 4365,3880 4770,3880 4900,3885 3600,3900 785,3910 1015,3910